# Altium PCB viper_eagle_rep.PcbDoc (part 1 of 4)
Units mm, origin at the board's own origin, x right, y up, seen from the top; angles counter-clockwise.
Board outline 285.4 x 100.18 mm, 2 copper layers (Component Side, Bottom Layer), stack 1.571 mm thick; 351 components, 206 nets, 1213 pads, 248 vias.
Unrouted connection lines stored in the file: 357.
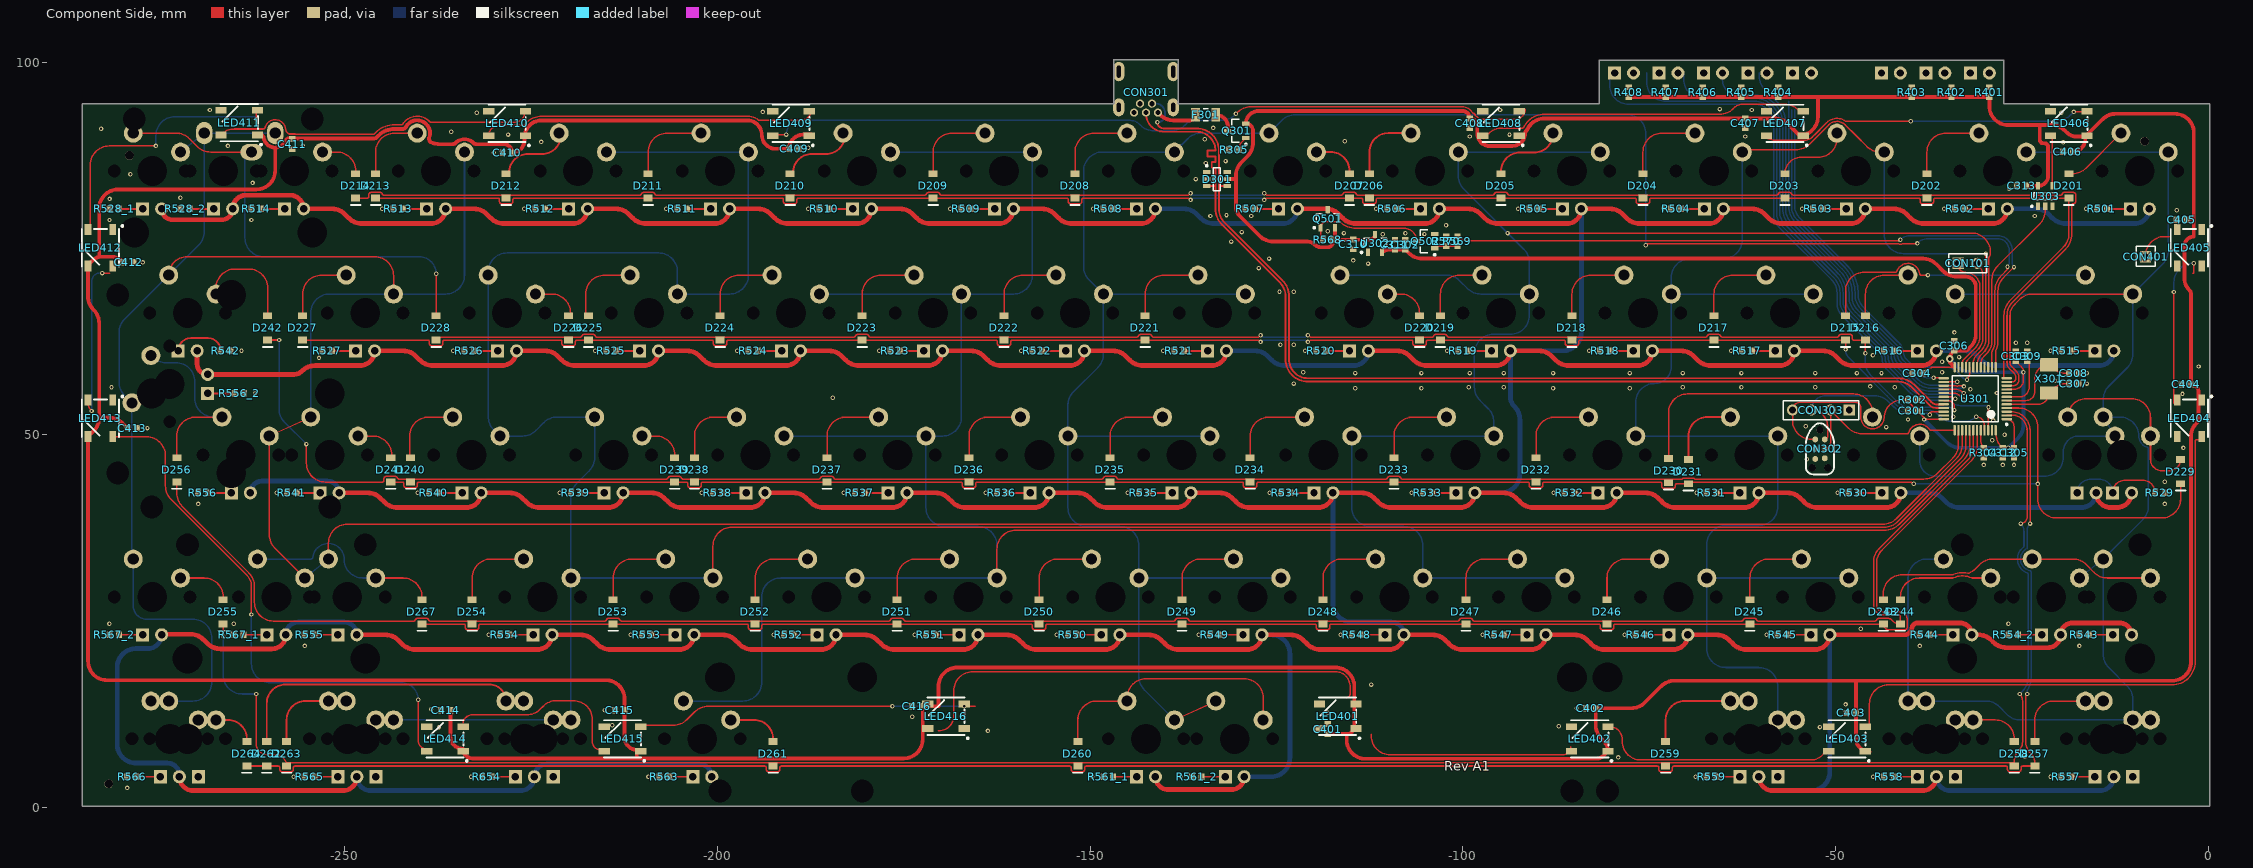
[diagram p0: Component Side view]
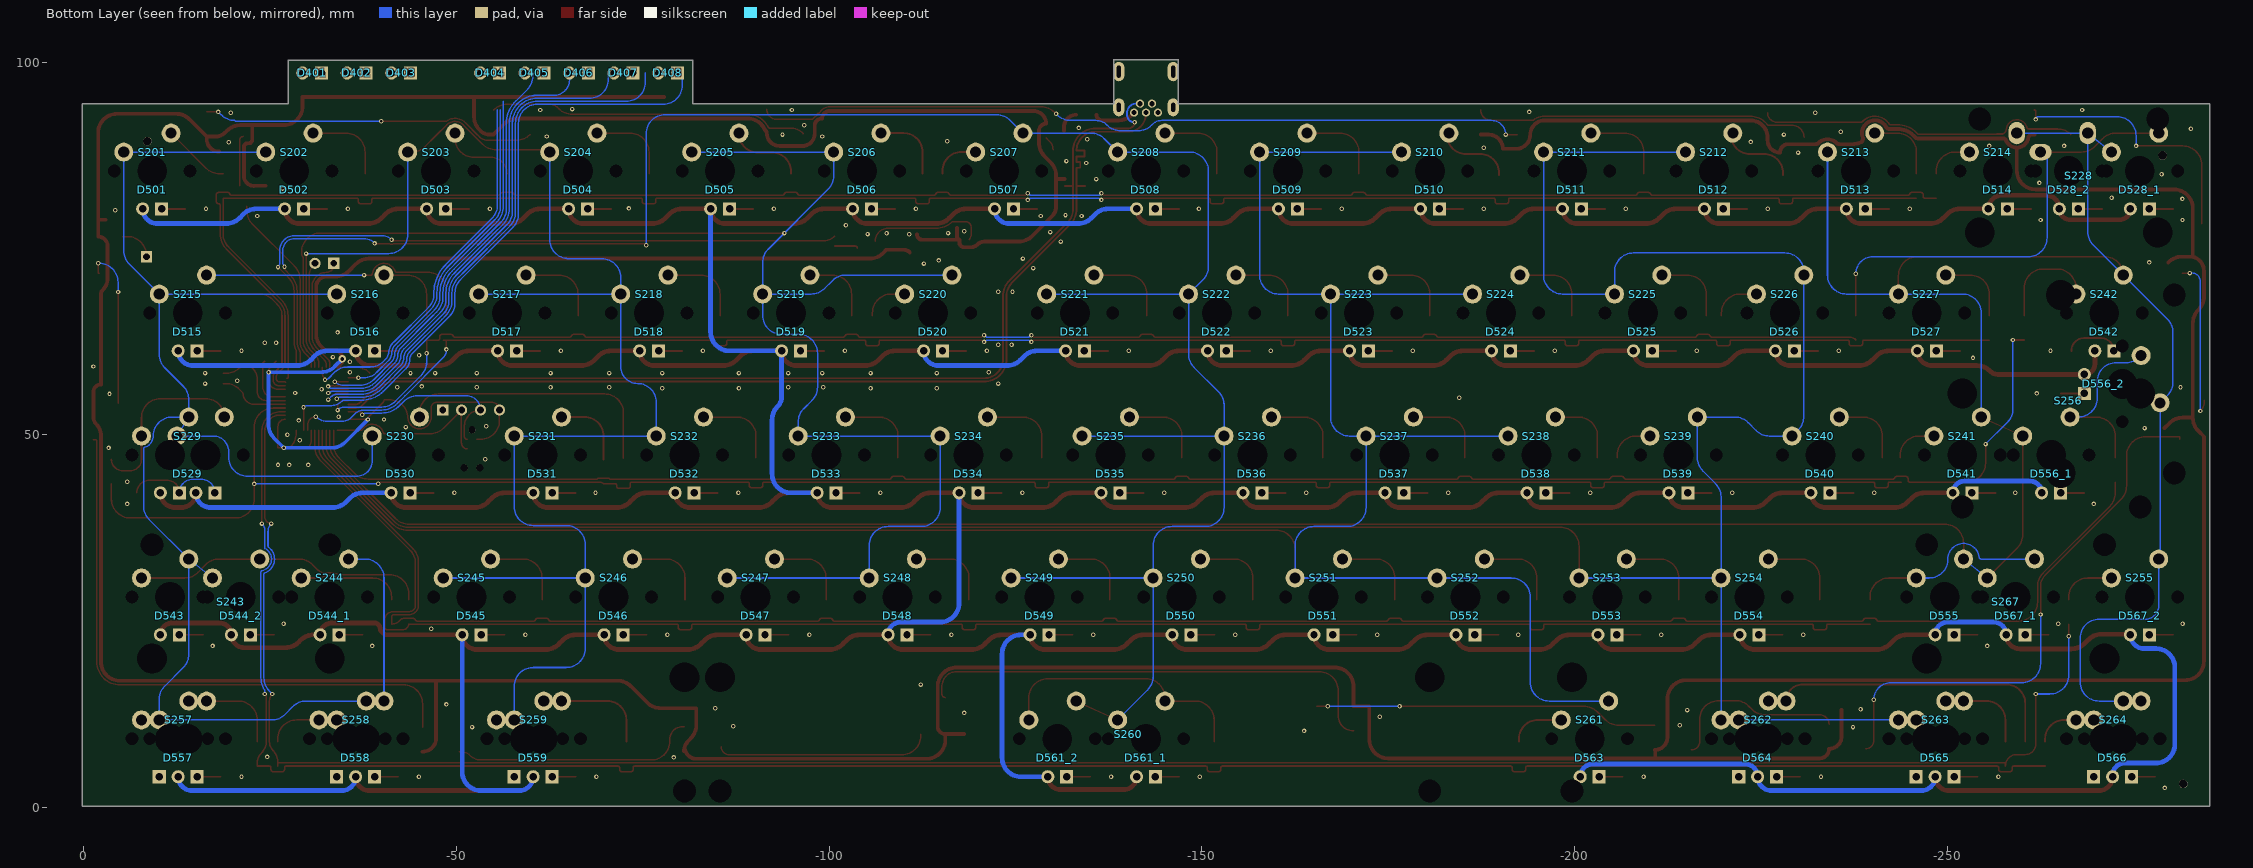
[diagram p1: Bottom Layer view, seen from below]

## Layer stack, top to bottom
Top Solder: solder mask 0.0102, Solder Resist, Dk 3.5
Component Side: signal copper 0.0356
Dielectric 1: core 1.5, FR-4, Dk 4.2
Bottom Layer: signal copper 0.0356
Solder Side: solder mask 0.0102, Solder Resist, Dk 3.5

## Board outline
-285.2,0.215 ccw(c-285.15,0.215) -285.15,0.165 0.15,0.165 ccw(c0.15,0.215) 0.2,0.215 ccw(c0.15,0.215) 0.2,0.215 0.2,94.415 ccw(c0.15,94.415) 0.149,94.465 -27.41,94.465 -27.41,98.044 -27.41,100.245 ccw(c-27.46,100.245) -27.46,100.295 -81.66,100.295 ccw(c-81.66,100.245) -81.71,100.245 -81.71,94.465 -138.15,94.465 -138.15,100.295 ccw(c-138.2,100.295) -138.2,100.345 -146.8,100.345 ccw(c-146.8,100.295) -146.85,100.295 -146.85,94.465 -285.15,94.465 ccw(c-285.15,94.415) -285.2,94.415

## Design rules (kind name [scope] priority, off if disabled: settings)
Clearance [All] p1: gap=0.2 ignorepadtopadclearanceinfootprint=FALSE except(0: Arc-Hole Track-Hole SMDPad-Hole THPad-Hole Via-Hole Fill-Hole Poly-Hole Region-Hole Text-Hole; 0.254: THPad-THPad THPad-Via THPad-Fill THPad-Poly THPad-Region THPad-Text Via-Via Via-Fill Via-Poly Via-Region Via-Text Fill-Fill Fill-Poly Fill-Region Fill-Text Poly-Poly Poly-Region Poly-Text Region-Region Region-Text Text-Text)
ComponentClearance [InComponent('No Component') And OnLayer('Component Side')] p1: gap=0.254 collisioncheckmode=3 verticalgap=0.254 showdistances=FALSE
DiffPairsRouting DiffPairsRouting_USB [InDifferentialPairClass('All Differential Pairs')] p1: maxlimit=0.254 minlimit=0.203 mostfreqgap=0.203 toplayer_minwidth=0.152 toplayer_maxwidth=0.381 toplayer_prefwidth=0.152 bottomlayer_minwidth=0.152 bottomlayer_maxwidth=0.381 bottomlayer_prefwidth=0.152 maxuncoupledlength=12.7
DiffPairsRouting [All] p2: maxlimit=0.254 minlimit=0.254 mostfreqgap=0.254 toplayer_minwidth=0.381 toplayer_maxwidth=0.381 toplayer_prefwidth=0.381 bottomlayer_minwidth=0.381 bottomlayer_maxwidth=0.381 bottomlayer_prefwidth=0.381 maxuncoupledlength=12.7
HoleSize [All] p1: absolutevalues=TRUE maxlimit=20 minlimit=0.025 maxpercent=80.000 minpercent=20.000
MatchedLengths MatchedLengths_USB_DiffPairs_1 [All] p1: tolerance=0.127 checknetsindiffpair=TRUE checkdiffpairvsdiffpair=FALSE checkxsignals=FALSE checkothers=FALSE
MatchedLengths MatchedLengths_USB_DiffPairs [All] p2: tolerance=0.127 checknetsindiffpair=TRUE checkdiffpairvsdiffpair=FALSE checkxsignals=FALSE checkothers=FALSE
PolygonConnect PolygonConnect_1 [All vs IsVia] p1: connectstyle=Direct reliefconductorwidth=0.254 reliefentries=4 polygonreliefangle="90 Angle" airgapwidth=0.254
PolygonConnect [All] p2: connectstyle=Relief reliefconductorwidth=0.254 reliefentries=4 polygonreliefangle="90 Angle" airgapwidth=0.254
RoutingVias [All] p1: holewidth=0.711 width=1.27 viastyle="Through Hole" minholewidth=0.3 minwidth=0.6 maxholewidth=0.711 maxwidth=1.27
SolderMaskExpansion [All] p1: expansion=0.102 istentingtop=FALSE
Width [All] p1: maxlimit=5 minlimit=0.203 preferedwidth=0.203 minimp=50.000000 maximp=50.000000 favimp=50.000000
27 further rules are at their usual default settings.

## Classes and differential pairs
component class 1_viper_eagle_rep_top: CON101
component class Designator: C201 C202 C203 C204 C205 C206 D201 D202 D203 D204 D205 D206 D207 D208 D209 D210 D211 D212 D213 D214 D215 D216 D217 D218 D219 D220 D221 D222 D223 D224 D225 D226 D227 D228 D229 D230 D231 D232 D233 D234 D235 D236 D237 D238 D239 D240 D241 D242 D243 D244 D245 D246 D247 D248 D249 D250 D251 D252 D253 D254 D255 D256 D257 D258 D259 D260 D261 D262 D263 D264 D267 S201 S202 S203 S204 S205 S206 S207 S208 S209 S210 S211 S212 S213 S214 S215 S216 S217 S218 S219 S220 S221 S222 S223 S224 S225 S226 S227 S228 S229 S230 S231 S232 S233 S234 S235 S236 S237 S238 S239 S240 S241 S242 S243 S244 S245 S246 S247 S248 S249 S250 S251 S252 S253 S254 S255 S256 S257 S258 S259 S260 S261 S262 S263 S264 S267
differential pair D: +D_P -D_N

## Components (designator, comment, footprint, x,y, rotation, side; value= is the part's Value field where it differs from the comment)
C301 "" C0603[1608] -39.624,53.213 r0 top value=0.1uF
C302 "" C0603[1608] -107.696,75.511 r270 top value=0.1uF
C303 "" C0603[1608] -25.781,60.54 r270 top value=0.1uF
C304 "" C0603[1608] -38.989,58.293 r0 top value=0.1uF
C305 "" C0603[1608] -26.035,47.625 r90 top value=0.1uF
C306 "" C0603[1608] -34.036,61.976 r270 top value=0.1uF
C307 "" C0603[1608] -18.034,56.896 r180 top value=30pF
C308 "" C0603[1608] -18.034,58.293 r180 top value=30pF
C309 "" C0603[1608] -24.257,60.54 r90 top value=0.1uF
C310 "" C0603[1608] -114.681,75.565 r90 top value=4,7uF
C311 "" C0603[1608] -109.093,75.511 r270 top value=1uF
C312 "" C0603[1608] -27.559,47.625 r90 top value=4,7uF
C313 "" C0603[1608] -25.019,83.439 r0 top value=0.1uF
C401 "" C0603[1608] -118.11,10.541 r270 top value=0.1uF
C402 "" C0603[1608] -82.804,13.335 r0 top value=0.1uF
C403 "" C0603[1608] -47.879,12.7 r0 top value=0.1uF
C404 "" C0603[1608] -2.921,56.769 r0 top value=0.1uF
C405 "" C0603[1608] -3.556,78.867 r0 top value=0.1uF
C406 "" C0603[1608] -18.796,88.011 r0 top value=0.1uF
C407 "" C0603[1608] -62.103,91.821 r90 top value=0.1uF
C408 "" C0603[1608] -99.06,91.821 r90 top value=0.1uF
C409 "" C0603[1608] -189.723,88.392 r180 top value=0.1uF
C410 "" C0603[1608] -228.219,87.884 r0 top value=0.1uF
C411 "" C0603[1608] -257.048,89.027 r90 top value=0.1uF
C412 "" C0603[1608] -279.019,73.152 r180 top value=0.1uF
C413 "" C0603[1608] -278.511,50.927 r180 top value=0.1uF
C414 "" C0603[1608] -236.474,13.081 r0 top value=0.1uF
C415 "" C0603[1608] -213.106,13.081 r0 top value=0.1uF
C416 "" C0603[1608] -173.228,13.589 r0 top value=0.1uF
CON101 "Header 2" HDR1X2#1 -33.528,73.025 r0 top
CON301 "HRO U-M-M5DD-W-2" "HRO U-M-M5DD-W-2" -142.5,93.95 r270 top locked
CON302 "TC2030-IDC" TC2030-IDC-NL -52.07,48.133 r270 top locked
CON303 "Header 4" HDR1X4 -55.753,53.34 r0 top locked
CON401 "Header 1" HDR1X2#2 -8.382,73.914 r90 top
D201 "Diode" SOD-123 -18.669,83.415 r90 top
D202 "Diode" SOD-123 -37.719,83.415 r90 top
D203 "Diode" SOD-123 -56.769,83.415 r90 top
D204 "Diode" SOD-123 -75.819,83.415 r90 top
D205 "Diode" SOD-123 -94.869,83.415 r90 top
D206 "Diode" SOD-123 -112.522,83.415 r90 top
D207 "Diode" SOD-123 -115.189,83.415 r90 top
D208 "Diode" SOD-123 -152.019,83.415 r90 top
D209 "Diode" SOD-123 -171.069,83.415 r90 top
D210 "Diode" SOD-123 -190.246,83.415 r90 top
D211 "Diode" SOD-123 -209.296,83.415 r90 top
D212 "Diode" SOD-123 -228.346,83.415 r90 top
D213 "Diode" SOD-123 -245.872,83.415 r90 top
D214 "Diode" SOD-123 -248.539,83.415 r90 top
D215 "Diode" SOD-123 -48.641,64.365 r90 top
D216 "Diode" SOD-123 -45.974,64.365 r90 top
D217 "Diode" SOD-123 -66.294,64.365 r90 top
D218 "Diode" SOD-123 -85.344,64.365 r90 top
D219 "Diode" SOD-123 -102.997,64.365 r90 top
D220 "Diode" SOD-123 -105.791,64.365 r90 top
D221 "Diode" SOD-123 -142.621,64.365 r90 top
D222 "Diode" SOD-123 -161.544,64.365 r90 top
D223 "Diode" SOD-123 -180.594,64.365 r90 top
D224 "Diode" SOD-123 -199.644,64.365 r90 top
D225 "Diode" SOD-123 -217.297,64.365 r90 top
D226 "Diode" SOD-123 -219.964,64.365 r90 top
D227 "Diode" SOD-123 -255.651,64.365 r90 top
D228 "Diode" SOD-123 -237.744,64.365 r90 top
D229 "Diode" SOD-123 -3.683,45.085 r90 top
D230 "Diode" SOD-123 -72.39,45.212 r90 top
D231 "Diode" SOD-123 -69.723,45.085 r90 top
D232 "Diode" SOD-123 -90.17,45.315 r90 top
D233 "Diode" SOD-123 -109.22,45.315 r90 top
D234 "Diode" SOD-123 -128.524,45.315 r90 top
D235 "Diode" SOD-123 -147.32,45.315 r90 top
D236 "Diode" SOD-123 -166.243,45.315 r90 top
D237 "Diode" SOD-123 -185.293,45.315 r90 top
D238 "Diode" SOD-123 -203.073,45.315 r90 top
D239 "Diode" SOD-123 -205.74,45.315 r90 top
D240 "Diode" SOD-123 -241.173,45.315 r90 top
D241 "Diode" SOD-123 -243.84,45.315 r90 top
D242 "Diode" SOD-123 -260.35,64.365 r90 top
D243 "Diode" SOD-123 -43.561,26.265 r90 top
D244 "Diode" SOD-123 -41.275,26.265 r90 top
D245 "Diode" SOD-123 -61.468,26.265 r90 top
D246 "Diode" SOD-123 -80.645,26.265 r90 top
D247 "Diode" SOD-123 -99.568,26.265 r90 top
D248 "Diode" SOD-123 -118.745,26.265 r90 top
D249 "Diode" SOD-123 -137.668,26.265 r90 top
D250 "Diode" SOD-123 -156.845,26.265 r90 top
D251 "Diode" SOD-123 -175.895,26.265 r90 top
D252 "Diode" SOD-123 -194.945,26.265 r90 top
D253 "Diode" SOD-123 -213.995,26.265 r90 top
D254 "Diode" SOD-123 -232.918,26.265 r90 top
D255 "Diode" SOD-123 -266.319,26.265 r90 top
D256 "Diode" SOD-123 -272.542,45.315 r90 top
D257 "Diode" SOD-123 -23.241,7.215 r90 top
D258 "Diode" SOD-123 -26,7.215 r90 top
D259 "Diode" SOD-123 -72.771,7.215 r90 top
D260 "Diode" SOD-123 -151.638,7.215 r90 top
D261 "Diode" SOD-123 -192.532,7.215 r90 top
D262 "Diode" SOD-123 -260.477,7.215 r90 top
D263 "Diode" SOD-123 -257.81,7.215 r90 top
D264 "Diode" SOD-123 -263.144,7.215 r90 top
D267 "Diode" SOD-123 -239.649,26.265 r90 top
D301 "SRV05" SOT-23-6 -132.969,84.328 r0 top
D401 "LED2" "LED - THT" -30.607,98.565 r180 bottom
D402 "LED2" "LED - THT" -36.576,98.565 r180 bottom
D403 "LED2" "LED - THT" -42.545,98.565 r180 bottom
D404 "LED2" "LED - THT" -54.483,98.565 r180 bottom
D405 "LED2" "LED - THT" -60.452,98.565 r180 bottom
D406 "LED2" "LED - THT" -66.421,98.565 r180 bottom
D407 "LED2" "LED - THT" -72.39,98.565 r180 bottom
D408 "LED2" "LED - THT" -78.359,98.565 r180 bottom
D501 "LED0" "MX-switch - LED" -9.15,85.415 r180 bottom
D502 "LED0" "MX-switch - LED" -28.2,85.415 r180 bottom
D503 "LED0" "MX-switch - LED" -47.25,85.415 r180 bottom
D504 "LED0" "MX-switch - LED" -66.3,85.415 r180 bottom
D505 "LED0" "MX-switch - LED" -85.35,85.415 r180 bottom
D506 "LED0" "MX-switch - LED" -104.4,85.415 r180 bottom
D507 "LED0" "MX-switch - LED" -123.45,85.415 r180 bottom
D508 "LED0" "MX-switch - LED" -142.5,85.415 r180 bottom
D509 "LED0" "MX-switch - LED" -161.55,85.415 r180 bottom
D510 "LED0" "MX-switch - LED" -180.6,85.415 r180 bottom
D511 "LED0" "MX-switch - LED" -199.65,85.415 r180 bottom
D512 "LED0" "MX-switch - LED" -218.7,85.415 r180 bottom
D513 "LED0" "MX-switch - LED" -237.75,85.415 r180 bottom
D514 "LED0" "MX-switch - LED" -256.8,85.415 r180 bottom
D515 "LED0" "MX-switch - LED" -13.912,66.365 r180 bottom
D516 "LED0" "MX-switch - LED" -37.725,66.365 r180 bottom
D517 "LED0" "MX-switch - LED" -56.775,66.365 r180 bottom
D518 "LED0" "MX-switch - LED" -75.825,66.365 r180 bottom
D519 "LED0" "MX-switch - LED" -94.875,66.365 r180 bottom
D520 "LED0" "MX-switch - LED" -113.925,66.365 r180 bottom
D521 "LED0" "MX-switch - LED" -132.975,66.365 r180 bottom
D522 "LED0" "MX-switch - LED" -152.025,66.365 r180 bottom
D523 "LED0" "MX-switch - LED" -171.075,66.365 r180 bottom
D524 "LED0" "MX-switch - LED" -190.125,66.365 r180 bottom
D525 "LED0" "MX-switch - LED" -209.175,66.365 r180 bottom
D526 "LED0" "MX-switch - LED" -228.225,66.365 r180 bottom
D527 "LED0" "MX-switch - LED" -247.275,66.365 r180 bottom
D528_1 "LED0" "MX-switch - LED" -275.844,85.415 r180 bottom
D528_2 "LED0" "MX-switch - LED" -266.319,85.415 r180 bottom
D529 "LED0" "MX-switch - CAPS - LED NO SWITCH" -16.294,47.315 r180 bottom
D530 "LED0" "MX-switch - LED" -42.487,47.315 r180 bottom
D531 "LED0" "MX-switch - LED" -61.537,47.315 r180 bottom
D532 "LED0" "MX-switch - LED" -80.587,47.315 r180 bottom
D533 "LED0" "MX-switch - LED" -99.637,47.315 r180 bottom
D534 "LED0" "MX-switch - LED" -118.687,47.315 r180 bottom
D535 "LED0" "MX-switch - LED" -137.737,47.315 r180 bottom
D536 "LED0" "MX-switch - LED" -156.787,47.315 r180 bottom
D537 "LED0" "MX-switch - LED" -175.837,47.315 r180 bottom
D538 "LED0" "MX-switch - LED" -194.887,47.315 r180 bottom
D539 "LED0" "MX-switch - LED" -213.937,47.315 r180 bottom
D540 "LED0" "MX-switch - LED" -232.987,47.315 r180 bottom
D541 "LED0" "MX-switch - LED" -252.031,47.315 r180 bottom
D542 "LED0" "MX-switch - LED" -271.087,66.365 r180 bottom
D543 "LED0" "MX-switch - LED" -11.531,28.265 r180 bottom
D544_1 "LED0" "MX-switch - LED" -32.96,28.265 r180 bottom
D544_2 "LED0" "MX-switch - LED" -21.056,28.265 r180 bottom
D545 "LED0" "MX-switch - LED" -52.012,28.265 r180 bottom
D546 "LED0" "MX-switch - LED" -71.062,28.265 r180 bottom
D547 "LED0" "MX-switch - LED" -90.112,28.265 r180 bottom
D548 "LED0" "MX-switch - LED" -109.162,28.265 r180 bottom
D549 "LED0" "MX-switch - LED" -128.212,28.265 r180 bottom
D550 "LED0" "MX-switch - LED" -147.262,28.265 r180 bottom
D551 "LED0" "MX-switch - LED" -166.312,28.265 r180 bottom
D552 "LED0" "MX-switch - LED" -185.362,28.265 r180 bottom
D553 "LED0" "MX-switch - LED" -204.412,28.265 r180 bottom
D554 "LED0" "MX-switch - LED" -223.462,28.265 r180 bottom
D555 "LED0" "MX-switch - LED" -249.655,28.265 r180 bottom
D556_1 "LED0" "MX-switch - LED" -263.95,47.315 r180 bottom
D556_2 "LED0" "MX-switch - LED" -273.48,56.845 r270 bottom
D557 "LED0" "MX-switch - LED - MODS" -13.912,9.215 r180 bottom
D558 "LED0" "MX-switch - LED - MODS" -37.719,9.215 r180 bottom
D559 "LED0" "MX-switch - LED - MODS" -61.537,9.215 r180 bottom
D561_1 "LED0" "MX-switch - LED" -142.499,9.215 r180 bottom
D561_2 "LED0" "MX-switch - LED" -130.593,9.215 r180 bottom
D563 "LED0" "MX-switch - LED" -202.031,9.215 r180 bottom
D564 "LED0" "MX-switch - LED - MODS" -225.843,9.215 r180 bottom
D565 "LED0" "MX-switch - LED - MODS" -249.65,9.215 r180 bottom
D566 "LED0" "MX-switch - LED - MODS" -273.468,9.215 r180 bottom
D567_1 "LED0" "MX-switch - LED" -259.18,28.265 r180 bottom
D567_2 "LED0" "MX-switch - LED" -275.85,28.265 r180 bottom
F301 "Fuse Thermal" C1206[3216] -134.493,92.964 r180 top
LED401 "WS2812B" WS2812B -116.783,12.25 r180 top
LED402 "WS2812B" WS2812B -82.969,9.215 r180 top
LED403 "WS2812B" WS2812B -48.438,9.215 r180 top
LED404 "WS2812B" WS2812B -2.5,52.235 r270 top
LED405 "WS2812B" WS2812B -2.5,75.115 r270 top
LED406 "WS2812B" WS2812B -18.675,91.8 r180 top
LED407 "WS2812B" WS2812B -56.775,91.8 r180 top
LED408 "WS2812B" WS2812B -94.875,91.8 r180 top
LED409 "WS2812B" WS2812B -190.125,91.8 r180 top
LED410 "WS2812B" WS2812B -228.225,91.8 r180 top
LED411 "WS2812B" WS2812B -264.16,91.9 r180 top
LED412 "WS2812B" WS2812B -282.8,75.115 r270 top
LED413 "WS2812B" WS2812B -282.8,52.235 r270 top
LED414 "WS2812B" WS2812B -236.556,9.215 r180 top
LED415 "WS2812B" WS2812B -212.747,9.215 r180 top
LED416 "WS2812B" WS2812B -169.339,12.25 r180 top
Q301 "PMOS-2" SOT-23-3 -130.302,90.805 r180 top
Q501 "SI2301CDS PMOS" SOT-23-3 -118.11,78.994 r90 top
Q502 "2N7002 NMOS" SOT-23-3 -104.976,76 r180 top
R302 "Res1" R0603[1608] -39.624,54.737 r0 top value=1.5K
R304 "Res1" R0603[1608] -30.099,47.625 r90 top value=10K
R305 "Res1" R0603[1608] -130.683,88.265 r180 top value=10K
R401 "Res1" R0603[1608] -29.337,96 r90 top value=680R
R402 "Res1" R0603[1608] -34.417,96 r90 top value=680R
R403 "Res1" R0603[1608] -39.751,96 r90 top value=680R
R404 "Res1" R0603[1608] -57.658,96 r90 top value=680R
R405 "Res1" R0603[1608] -62.611,96 r90 top value=680R
R406 "Res1" R0603[1608] -67.818,96 r90 top value=680R
R407 "Res1" R0603[1608] -72.771,96 r90 top value=680R
R408 "Res1" R0603[1608] -77.724,96 r90 top value=680R
R501 "Res1" R0603[1608] -14.23,80.335 r0 top value=680R
R502 "Res1" R0603[1608] -33.28,80.335 r0 top value=680R
R503 "Res1" R0603[1608] -52.33,80.335 r0 top value=680R
R504 "Res1" R0603[1608] -71.38,80.335 r0 top value=680R
R505 "Res1" R0603[1608] -90.43,80.335 r0 top value=680R
R506 "Res1" R0603[1608] -109.48,80.335 r0 top value=680R
R507 "Res1" R0603[1608] -128.53,80.335 r0 top value=680R
R508 "Res1" R0603[1608] -147.58,80.335 r0 top value=680R
R509 "Res1" R0603[1608] -166.63,80.335 r0 top value=680R
R510 "Res1" R0603[1608] -185.68,80.335 r0 top value=680R
R511 "Res1" R0603[1608] -204.73,80.335 r0 top value=680R
R512 "Res1" R0603[1608] -223.78,80.335 r0 top value=680R
R513 "Res1" R0603[1608] -242.83,80.335 r0 top value=680R
R514 "Res1" R0603[1608] -261.88,80.335 r0 top value=680R
R515 "Res1" R0603[1608] -18.992,61.285 r0 top value=680R
R516 "Res1" R0603[1608] -42.805,61.285 r0 top value=680R
R517 "Res1" R0603[1608] -61.855,61.285 r0 top value=680R
R518 "Res1" R0603[1608] -80.905,61.285 r0 top value=680R
R519 "Res1" R0603[1608] -99.955,61.285 r0 top value=680R
R520 "Res1" R0603[1608] -119.005,61.285 r0 top value=680R
R521 "Res1" R0603[1608] -138.055,61.285 r0 top value=680R
R522 "Res1" R0603[1608] -157.105,61.285 r0 top value=680R
R523 "Res1" R0603[1608] -176.155,61.285 r0 top value=680R
R524 "Res1" R0603[1608] -195.205,61.285 r0 top value=680R
R525 "Res1" R0603[1608] -214.255,61.285 r0 top value=680R
R526 "Res1" R0603[1608] -233.305,61.285 r0 top value=680R
R527 "Res1" R0603[1608] -252.355,61.285 r0 top value=680R
R528_1 "Res1" R0603[1608] -280.924,80.335 r0 top value=680R
R528_2 "Res1" R0603[1608] -271.399,80.335 r0 top value=680R
R529 "Res1" R0603[1608] -6.451,42.235 r180 top value=680R
R530 "Res1" R0603[1608] -47.567,42.235 r0 top value=680R
R531 "Res1" R0603[1608] -66.617,42.235 r0 top value=680R
R532 "Res1" R0603[1608] -85.667,42.235 r0 top value=680R
R533 "Res1" R0603[1608] -104.717,42.235 r0 top value=680R
R534 "Res1" R0603[1608] -123.767,42.235 r0 top value=680R
R535 "Res1" R0603[1608] -142.817,42.235 r0 top value=680R
R536 "Res1" R0603[1608] -161.867,42.235 r0 top value=680R
R537 "Res1" R0603[1608] -180.917,42.235 r0 top value=680R
R538 "Res1" R0603[1608] -199.967,42.235 r0 top value=680R
R539 "Res1" R0603[1608] -219.017,42.235 r0 top value=680R
R540 "Res1" R0603[1608] -238.067,42.235 r0 top value=680R
R541 "Res1" R0603[1608] -257.112,42.235 r0 top value=680R
R542 "Res1" R0603[1608] -266.007,61.285 r180 top value=680R
R543 "Res1" R0603[1608] -16.611,23.185 r0 top value=680R
R544 "Res1" R0603[1608] -38.04,23.185 r0 top value=680R
R545 "Res1" R0603[1608] -57.092,23.185 r0 top value=680R
R546 "Res1" R0603[1608] -76.142,23.185 r0 top value=680R
R547 "Res1" R0603[1608] -95.192,23.185 r0 top value=680R
R548 "Res1" R0603[1608] -114.242,23.185 r0 top value=680R
R549 "Res1" R0603[1608] -133.292,23.185 r0 top value=680R
R550 "Res1" R0603[1608] -152.342,23.185 r0 top value=680R
R551 "Res1" R0603[1608] -171.392,23.185 r0 top value=680R
R552 "Res1" R0603[1608] -190.442,23.185 r0 top value=680R
R553 "Res1" R0603[1608] -209.492,23.185 r0 top value=680R
R554 "Res1" R0603[1608] -228.542,23.185 r0 top value=680R
R554_2 "Res1" R0603[1608] -26.136,23.185 r0 top value=680R
R555 "Res1" R0603[1608] -254.735,23.185 r0 top value=680R
R556 "Res1" R0603[1608] -269.03,42.235 r0 top value=680R
R556_2 "Res1" R0603[1608] -264.16,55.575 r180 top value=680R
R557 "Res1" R0603[1608] -18.992,4.135 r0 top value=680R
R558 "Res1" R0603[1608] -42.799,4.135 r0 top value=680R
R559 "Res1" R0603[1608] -66.617,4.135 r0 top value=680R
R561_1 "Res1" R0603[1608] -147.579,4.135 r0 top value=680R
R561_2 "Res1" R0603[1608] -135.673,4.135 r0 top value=680R
R563 "Res1" R0603[1608] -207.111,4.135 r0 top value=680R
R565 "Res1" R0603[1608] -254.73,4.135 r0 top value=680R
R566 "Res1" R0603[1608] -278.548,4.135 r0 top value=680R
R567_1 "Res1" R0603[1608] -264.26,23.185 r0 top value=680R
R567_2 "Res1" R0603[1608] -280.93,23.185 r0 top value=680R
R568 "Res1" R0603[1608] -118.11,76.2 r0 top value=2M
R569 "Res1" R0603[1608] -100.711,76 r270 top value=330R
R570 "Res1" R0603[1608] -102.235,76 r90 top value=100k
R654 "Res1" R0603[1608] -230.923,4.135 r0 top value=680R
S201 "MX" "MX-SWITCH - SWITCHED POL" -9.15,85.415 r180 bottom locked
S202 "MX" "MX-switch - switched pol - connector" -28.2,85.415 r180 bottom
S203 "MX" "MX-SWITCH - SWITCHED POL" -47.25,85.415 r180 bottom locked
S204 "MX" "MX-switch - switched pol" -66.3,85.415 r180 bottom
S205 "MX" "MX-switch - switched pol" -85.35,85.415 r180 bottom
S206 "MX" "MX-switch - switched pol" -104.4,85.415 r180 bottom locked
S207 "MX" MX-switch#1 -123.45,85.415 r180 bottom locked
S208 "MX" "MX-switch - switched pol" -142.5,85.415 r180 bottom locked
S209 "MX" "MX-switch - switched pol" -161.55,85.415 r180 bottom locked
S210 "MX" "MX-switch - switched pol" -180.6,85.415 r180 bottom locked
S211 "MX" "MX-switch - switched pol" -199.65,85.415 r180 bottom
S212 "MX" "MX-switch - switched pol" -218.7,85.415 r180 bottom locked
S213 "MX" "MX-switch - switched pol" -237.75,85.415 r180 bottom
S214 "MX" MX-switch#2 -256.8,85.415 r180 bottom locked
S215 "MX" "MX-switch - 1.5U" -13.912,66.365 r180 bottom locked
S216 "MX" "MX-SWITCH - SWITCHED POL" -37.725,66.365 r180 bottom locked
S217 "MX" "MX-SWITCH - SWITCHED POL" -56.775,66.365 r180 bottom locked
S218 "MX" "MX-SWITCH - SWITCHED POL" -75.825,66.365 r180 bottom locked
S219 "MX" "MX-SWITCH - SWITCHED POL" -94.875,66.365 r180 bottom locked
S220 "MX" MX-switch#1 -113.925,66.365 r180 bottom locked
S221 "MX" "MX-SWITCH - SWITCHED POL" -132.975,66.365 r180 bottom locked
S222 "MX" "MX-SWITCH - SWITCHED POL" -152.025,66.365 r180 bottom locked
S223 "MX" "MX-SWITCH - SWITCHED POL" -171.075,66.365 r180 bottom locked
S224 "MX" "MX-SWITCH - SWITCHED POL" -190.125,66.365 r180 bottom locked
S225 "MX" "MX-SWITCH - SWITCHED POL" -209.175,66.365 r180 bottom locked
S226 "MX" MX-switch#1 -228.225,66.365 r180 bottom locked
S227 "MX" "MX-SWITCH - SWITCHED POL" -247.275,66.365 r180 bottom locked
S228 "MX" "MX-switch - backspace" -266.319,85.415 r180 bottom locked
S229 "MX" "MX-switch - CAPS" -16.294,47.315 r180 bottom locked
S230 "MX" "MX-SWITCH - SWITCHED POL" -42.487,47.315 r180 bottom locked
S231 "MX" "MX-SWITCH - SWITCHED POL" -61.537,47.315 r180 bottom locked
S232 "MX" "MX-SWITCH - SWITCHED POL" -80.587,47.315 r180 bottom locked
S233 "MX" "MX-SWITCH - SWITCHED POL" -99.637,47.315 r180 bottom locked
S234 "MX" "MX-SWITCH - SWITCHED POL" -118.687,47.315 r180 bottom locked
S235 "MX" "MX-SWITCH - SWITCHED POL" -137.737,47.315 r180 bottom locked
S236 "MX" "MX-SWITCH - SWITCHED POL" -156.787,47.315 r180 bottom locked
S237 "MX" "MX-SWITCH - SWITCHED POL" -175.837,47.315 r180 bottom locked
S238 "MX" "MX-SWITCH - SWITCHED POL" -194.887,47.315 r180 bottom locked
S239 "MX" MX-switch#1 -213.937,47.315 r180 bottom locked
S240 "MX" "MX-SWITCH - SWITCHED POL" -232.987,47.315 r180 bottom locked
S241 "MX" MX-switch#1 -252.031,47.315 r180 bottom locked
S242 "MX" "MX-switch - 1.5U" -271.087,66.365 r180 bottom locked
S243 "MX" "MX-SWITCH - LEFT SHIFT" -21.056,28.265 r180 bottom locked
S244 "MX" MX-switch#1 -32.96,28.265 r180 bottom locked
S245 "MX" "MX-SWITCH - SWITCHED POL" -52.012,28.265 r180 bottom locked
S246 "MX" "MX-SWITCH - SWITCHED POL" -71.062,28.265 r180 bottom locked
S247 "MX" "MX-SWITCH - SWITCHED POL" -90.112,28.265 r180 bottom locked
S248 "MX" "MX-SWITCH - SWITCHED POL" -109.162,28.265 r180 bottom locked
S249 "MX" "MX-SWITCH - SWITCHED POL" -128.212,28.265 r180 bottom locked
S250 "MX" "MX-SWITCH - SWITCHED POL" -147.262,28.265 r180 bottom locked
S251 "MX" "MX-SWITCH - SWITCHED POL" -166.312,28.265 r180 bottom locked
S252 "MX" "MX-SWITCH - SWITCHED POL" -185.362,28.265 r180 bottom locked
S253 "MX" "MX-SWITCH - SWITCHED POL" -204.412,28.265 r180 bottom locked
S254 "MX" "MX-SWITCH - SWITCHED POL" -223.462,28.265 r180 bottom locked
S255 "MX" MX-switch#1 -275.85,28.265 r180 bottom locked
S256 "MX" "MX-switch - Enter - rotated ISO" -263.95,47.315 r180 bottom locked
S257 "MX" "MX-switch - 1.5u MOD-L" -13.912,9.215 r180 bottom locked
S258 "MX" "MX-switch - 1u MOD-L" -37.719,9.215 r180 bottom locked
S259 "MX" "MX-switch - 1.5u MOD-L" -61.537,9.215 r180 bottom locked
S260 "MX" "MX-switch - Space_V2" -142.499,9.215 r180 bottom locked
S261 "MX" MX-switch#1 -202.031,9.215 r180 bottom locked
S262 "MX" "MX-switch - 1.5u MOD-R" -223.462,9.215 r180 bottom locked
S263 "MX" "MX-switch - 1u MOD-R" -247.269,9.215 r180 bottom locked
S264 "MX" "MX-switch - 1.5u MOD-R" -271.087,9.215 r180 bottom locked
S267 "MX" "MX-SWITCH - RIGHT SHIFT" -259.18,28.265 r180 bottom locked
U301 "STM32F072/F303_LQFP48" "STM32 - LQFP48, 7x7mm" -31.242,54.864 r180 top locked
U302 "SOT23 LDO" SOT-23-3 -111.76,75.692 r90 top
U303 "SN74LV1T125" SOT-23-5 -21.844,82.042 r90 top
X301 "XTAL" "CTS 445-series crystal" -21.336,57.531 r90 top value=8MHz

## Footprints (in the part's own frame and the unit in brackets; to place one, negate y for a bottom-side part, rotate by r counter-clockwise, add the part's x,y. Pads: shape width x height; smd on the part's side, far side on the other; paste and mask are expansions set on the pad)
C0603[1608] [mm] "Chip Resistor, 2-Leads, Body 1,57x0,80mm, IPC Medium Density"
  rect 0.8x0.85 smd: 1(-0.65,0) 2(0.65,0)
  body extent -0.83,-0.43 0.82,0.43, height 0.5
C1206[3216] [mm]
  rect 1.2x1.8 smd: 1(-1.35,0) 2(1.35,0)
  silkscreen extent -0.35,-0.8 0.35,0.8, body extent -1.6,-0.9 1.6,0.9, height 1.2
"CTS 445-series crystal" [mm]
  rect 1.8x2.4 smd: 1(-1.9,0) 2(1.9,0)
  body extent -2.5,-1.6 2.5,1.6, height 1.3
HDR1X2#1 [mm] "Connector; Header; 2 Position"
  rect 1.5x1.5 hole 0.9: 1(0,0)
  round 1.5 hole 0.9: 2(2.54,0)
  silkscreen extent -1.27,-1.27 3.81,1.27
HDR1X2#2 [mm] "Connector; Header; 2 Position"
  rect 1.5x1.5 hole 0.9: 1(0,0)
  silkscreen extent -1.27,-1.27 1.38,1.27
HDR1X4 [mm] "Connector; Header; 4 Position"
  round 1.5 hole 0.9 mask+0.102: 1(0,0) 2(2.54,0) 3(5.08,0)
  rect 1.5x1.5 hole 0.9 mask+0.102: 4(7.62,0)
  silkscreen extent -1.27,-1.27 8.89,1.27
"HRO U-M-M5DD-W-2" [mm]
  round 1.1 hole 0.7: 1(0.7,1.6) 2(-0.5,0.8) 3(0.7,0) 4(-0.5,-0.8) 5(0.7,-1.6)
  oval 2.6x1.5 hole 0.5 slot 1.6 at 0 deg: S(-4.8,3.65) S(-4.8,-3.65)
  oval 2.4x1.5 hole 0.5 slot 1.2 at 0 deg: S(0,3.65) S(0,-3.65)
"LED - THT" [mm] "MX Spec"
  round 1.75 hole 1 mask+0.102: 1(-1.27,0)
  rect 1.75x1.75 hole 1 mask+0.102: 2(1.27,0)
  round 1 on Mech14: ""(0,0)
MX-switch#1 [mm]
  round 2.54 hole 1.499 mask+0.102: 1(-3.81,2.54) 2(2.54,5.08)
  round 1 hole 1.702 unplated: ""(-5.08,0) ""(5.08,0)
  round 1 hole 3.988 unplated: ""(0,0)
MX-switch#2 [mm]
  round 2.54 hole 1.499 mask+0.102: 1(-3.81,2.54)
  oval 2.2x3 hole 1.499 mask+0.102: 2(2.54,5.08)
  round 1 hole 1.702 unplated: ""(-5.08,0) ""(5.08,0)
  round 1 hole 3.988 unplated: ""(0,0)
"MX-switch - 1.5U" [mm]
  round 2.54 hole 1.499 mask+0.102: 1(-3.81,2.54) 2(2.54,5.08)
  round 1 hole 1.702 unplated: ""(-5.08,0) ""(5.08,0)
  round 1 hole 3.988 unplated: ""(0,0)
  round 1 on Mech14: ""(0,0)
"MX-switch - 1.5u MOD-L" [mm]
  round 2.54 hole 1.499 mask+0.102: 1(-6.191,2.54) 1(-3.81,2.54) 2(0.159,5.08) 2(2.54,5.08)
  round 1 hole 1.702 unplated: ""(-7.461,0) ""(-5.08,0) ""(2.699,0) ""(5.08,0)
  round 1 on Mech14: ""(-4.763,0) ""(-2.381,0) ""(0,0) ""(4.763,0)
  round 1 hole 3.988 unplated: ""(-2.381,0) ""(0,0)
"MX-switch - 1.5u MOD-R" [mm]
  round 2.54 hole 1.499 mask+0.102: 1(-3.81,2.54) 1(-1.429,2.54) 2(2.54,5.08) 2(4.921,5.08)
  round 1 hole 1.702 unplated: ""(-5.08,0) ""(-2.699,0) ""(5.08,0) ""(7.461,0)
  round 1 on Mech14: ""(-2.381,0) ""(0,0) ""(2.381,0) ""(4.763,0)
  round 1 hole 3.988 unplated: ""(0,0) ""(2.381,0)
"MX-switch - 1u MOD-L" [mm]
  round 2.54 hole 1.499 mask+0.102: 1(-6.191,2.54) 1(-3.81,2.54) 2(0.159,5.08) 2(2.54,5.08)
  round 1 hole 1.702 unplated: ""(-7.461,0) ""(-5.08,0) ""(2.699,0) ""(5.08,0)
  round 1 hole 3.988 unplated: ""(-2.381,0) ""(0,0)
  round 1 on Mech14: ""(-2.381,0) ""(0,0) ""(2.381,0)
"MX-switch - 1u MOD-R" [mm]
  round 2.54 hole 1.499 mask+0.102: 1(-3.81,2.54) 1(-1.429,2.54) 2(2.54,5.08) 2(4.921,5.08)
  round 1 hole 1.702 unplated: ""(-5.08,0) ""(-2.699,0) ""(5.08,0) ""(7.461,0)
  round 1 on Mech14: ""(-4.763,0) ""(-2.381,0) ""(0,0) ""(2.381,0)
  round 1 hole 3.988 unplated: ""(0,0) ""(2.381,0)
"MX-switch - backspace" [mm]
  oval 2.2x3 hole 1.499 mask+0.102: 1(2.54,5.08)
  round 2.54 hole 1.499 mask+0.102: 1(5.715,2.54) 2(12.065,5.08)
  oval 3x2.2 hole 1.499 mask+0.102: 2(-3.81,2.54)
  round 1.524 hole 3.988 unplated: ""(-11.938,-8.255) ""(11.938,-8.255)
  round 1.524 hole 3.048 unplated: ""(-11.938,6.985) ""(11.938,6.985)
  round 1 hole 1.702 unplated: ""(-5.08,0) ""(4.445,0) ""(5.08,0) ""(14.605,0)
  round 1 hole 3.988 unplated: ""(0,0) ""(9.525,0)
  round 1 on Mech14: ""(0,0) ""(9.525,0)
"MX-switch - CAPS" [mm]
  round 2.54 hole 1.499 mask+0.102: 1(-8.572,2.54) 1(2.54,5.08) 2(-3.81,2.54) 2(-2.222,5.08)
  round 1 hole 1.702 unplated: ""(-9.842,0) ""(5.08,0)
  round 1 hole 3.988 unplated: ""(-4.763,0) ""(0,0)
  round 1 on Mech14: ""(-4.763,0) ""(0,0)
"MX-switch - CAPS - LED NO SWITCH" [mm]
  round 1.75 hole 1 mask+0.102: 1(-6.033,-5.08) 1(-1.27,-5.08)
  rect 1.75x1.75 hole 1 mask+0.102: 2(-3.493,-5.08) 2(1.27,-5.08)
  round 1 on Mech14: ""(0,0)
"MX-switch - Enter - rotated ISO" [mm]
  round 2.54 hole 1.499 mask+0.102: 1(2.54,5.08) 1(12.07,13.34) 2(-3.81,2.54) 2(14.61,6.99)
  round 1.524 hole 3.048 unplated: ""(-11.938,-6.985) ""(11.938,-6.985) ""(16.515,-2.408) ""(16.515,21.468)
  round 1.524 hole 3.988 unplated: ""(-11.938,8.255) ""(1.275,-2.408) ""(1.275,21.468) ""(11.938,8.255)
  round 1 hole 1.702 unplated: ""(-5.08,0) ""(5.08,0) ""(9.53,4.45) ""(9.53,14.61)
  round 1 hole 3.988 unplated: ""(0,0) ""(9.53,9.53)
  round 1 on Mech14: ""(0,0) ""(9.53,9.53)
"MX-switch - LED" [mm]
  round 1.75 hole 1 mask+0.102: 1(-1.27,-5.08)
  rect 1.75x1.75 hole 1 mask+0.102: 2(1.27,-5.08)
  round 1 on Mech14: ""(0,0)
"MX-switch - LED - MODS" [mm]
  round 1.75 hole 1 mask+0.102: 1(-1.27,-5.08)
  rect 1.75x1.75 hole 1 mask+0.102: 2(-3.81,-5.08) 2(1.27,-5.08)
  round 1 on Mech14: ""(0,0)
"MX-SWITCH - LEFT SHIFT" [mil]
  round 100 hole 59 mask+4: 1(-525,100) 1(100,200) 2(-275,200) 2(-150,100)
  round 39.37 hole 67.01 unplated: ""(-575,0) ""(-200,0) ""(-175,0) ""(200,0)
  round 60 hole 157.01 unplated: ""(-470,-325) ""(470,-325)
  round 60 hole 120 unplated: ""(-470,275) ""(470,275)
  round 39.37 hole 157.01 unplated: ""(-375,0) ""(0,0)
  round 39.37 on Mech14: ""(-375,0) ""(0,0)
"MX-SWITCH - RIGHT SHIFT" [mil]
  round 100 hole 59 mask+4: 1(-525,100) 1(100,200) 2(-275,200) 2(-150,100)
  round 39.37 hole 67.01 unplated: ""(-575,0) ""(-200,0) ""(-175,0) ""(200,0)
  round 60 hole 157.01 unplated: ""(-470,-325) ""(470,-325)
  round 60 hole 120 unplated: ""(-470,275) ""(470,275)
  round 39.37 hole 157.01 unplated: ""(-375,0) ""(0,0)
  round 39.37 on Mech14: ""(-375,0) ""(0,0)
"MX-switch - Space_V2" [mil]
  round 100 hole 59 mask+4: 1(-368.75,200) 1(-150,100) 2(-618.75,100) 2(100,200)
  round 60 hole 120 unplated: ""(-2437.4,-275) ""(-2250,-275) ""(1499.61,-275) ""(2250,-275)
  round 60 hole 157.01 unplated: ""(-2437.4,325) ""(-2250,325) ""(1499.61,325) ""(2250,325)
  round 39.37 hole 67.01 unplated: ""(-668.75,0) ""(-268.75,0) ""(-200,0) ""(200,0)
  round 39.37 hole 157.01 unplated: ""(-468.75,0) ""(0,0)
  round 39.37 on Mech14: ""(-468.75,0) ""(0,0)
"MX-SWITCH - SWITCHED POL" [mm]
  round 2.54 hole 1.499 mask+0.102: 1(2.54,5.08) 2(-3.81,2.54)
  round 1 hole 1.702 unplated: ""(-5.08,0) ""(5.08,0)
  round 1 hole 3.988 unplated: ""(0,0)
"MX-switch - switched pol" [mm]
  round 2.54 hole 1.499 mask+0.102: 1(2.54,5.08) 2(-3.81,2.54)
  round 1 hole 1.702 unplated: ""(-5.08,0) ""(5.08,0)
  round 1 hole 3.988 unplated: ""(0,0)
"MX-switch - switched pol - connector" [mm]
  round 2.54 hole 1.499 mask+0.102: 1(2.54,5.08) 2(-3.81,2.54)
  round 1 hole 1.702 unplated: ""(-5.08,0) ""(5.08,0)
  round 1 hole 3.988 unplated: ""(0,0)
R0603[1608] [mm] "Chip Resistor, 2-Leads, Body 1,57x0,80mm, IPC Medium Density"
  rect 0.8x0.85 smd: 1(-0.65,0) 2(0.65,0)
  body extent -0.83,-0.43 0.82,0.43, height 0.5
SOD-123 [mm]
  rect 0.91x1.22 smd: 1(1.635,0) 2(-1.635,0)
  silkscreen extent -2.54,-0.64 -2.54,0.63, body extent -1.87,-0.85 1.88,0.85, height 1.2
SOT-23-3 [mm] "3.3v regulator, used in Windsond S2 proto 1"
  rect 1x0.55 smd: 1(-1.2,0.95) 2(-1.2,-0.95) 3(1.2,0)
  silkscreen extent -1.33,-1.55 0.7,1.95, body extent -1.45,-1.5 1.1,1.5, height 1
SOT-23-5 [mm]
  rect 1x0.55 smd: 1(-1.375,0.95) 2(-1.375,0) 3(-1.375,-0.95) 4(1.375,-0.95) 5(1.375,0.95)
  silkscreen extent -1.5,-1.55 0.46,1.92, body extent -1.63,-1.5 1.58,1.5, height 0.92
SOT-23-6 [mm]
  rect 1x0.55 smd: 1(-1.375,0.95) 2(-1.375,0) 3(-1.375,-0.95) 4(1.375,-0.95) 5(1.375,0) 6(1.375,0.95)
  silkscreen extent -1.5,-1.55 0.46,1.92, body extent -1.37,-1.44 1.47,1.49, height 1.05
"STM32 - LQFP48, 7x7mm" [mm] "LQFP48, 7x7mm"
  oval 1.45x0.3 smd: 1(-4.225,2.75) 2(-4.225,2.25) 3(-4.225,1.75) 4(-4.225,1.25) 5(-4.225,0.75) 6(-4.225,0.25) 7(-4.225,-0.25) 8(-4.225,-0.75) 9(-4.225,-1.25) 10(-4.225,-1.75) 11(-4.225,-2.25) 12(-4.225,-2.75) 25(4.225,-2.75) 26(4.225,-2.25) 27(4.225,-1.75) 28(4.225,-1.25) 29(4.225,-0.75) 30(4.225,-0.25) 31(4.225,0.25) 32(4.225,0.75) 33(4.225,1.25) 34(4.225,1.75) 35(4.225,2.25) 36(4.225,2.75)
  oval 0.3x1.45 smd: 13(-2.75,-4.225) 14(-2.25,-4.225) 15(-1.75,-4.225) 16(-1.25,-4.225) 17(-0.75,-4.225) 18(-0.25,-4.225) 19(0.25,-4.225) 20(0.75,-4.225) 21(1.25,-4.225) 22(1.75,-4.225) 23(2.25,-4.225) 24(2.75,-4.225) 37(2.75,4.225) 38(2.25,4.225) 39(1.75,4.225) 40(1.25,4.225) 41(0.75,4.225) 42(0.25,4.225) 43(-0.25,4.225) 44(-0.75,4.225) 45(-1.25,4.225) 46(-1.75,4.225) 47(-2.25,4.225) 48(-2.75,4.225)
  silkscreen extent -4.35,-3.1 3.1,3.57, body extent -4.5,-4.5 4.5,4.5, height 1.6
TC2030-IDC-NL [mm] "Tag-Connect 6-Pin with No Legs (PN# TC2030-IDC-NL)"
  round 0.9 hole 0.995 unplated: 0(-2.54,0) 0(2.54,1.016) 0(2.54,-1.016)
  round 0.79 smd paste-0.39: 1(-1.27,-0.635) 2(-1.27,0.635) 3(0,-0.635) 4(0,0.635) 5(1.35,-0.635) 6(1.27,0.635)
  silkscreen extent -3.43,-1.9 3.43,1.9
WS2812B [mm]
  rect 1.5x0.9 smd: 1(-2.45,1.65) 2(-2.45,-1.65) 3(2.45,-1.65) 4(2.45,1.65)
  silkscreen extent -3.05,-2.5 2.5,3.07, body extent -2.65,-2.45 2.7,2.5, height 1.5

## Part data
C301 C302 C303 C304 C305 C306 C309 C313 C401 C402 C403 C404 C405 C406 C407 C408 C409 C410 C411 C412 C413 C414 C415 C416: library part Cap, "Capacitor", LCSC MFG=YAGEO, LCSC Part #=C14663, MFG=KEMET, MFGPN=C0603C104M5RACTU, MRF.Part=CC0603KRX7R9BB104, Version="0603 imperial"
C307 C308: library part Cap, "Capacitor", LCSC MFG="Samsung Electro-Mechanics", LCSC Part #=C22397, MRF.Part=CL10C300JB8NNNC, Version="0603 imperial"
C310 C312: library part Cap, "Capacitor", LCSC MFG="Samsung Electro-Mechanics", LCSC Part #=C19666
C311: library part Cap, "Capacitor", LCSC MFG="Samsung Electro-Mechanics", LCSC Part #=C15849, MFG=KEMET, MFGPN=C0603C104M5RACTU, MRF.Part=CL10A105KB8NNNC, Version="0603 imperial"
CON101: "Header, 2-Pin", LatestRevisionDate=17-Jul-2002, LatestRevisionNote="Re-released for DXP Platform.", Publisher="Altium Limited"
CON302: library part "Header 3X2", "Header, 3-Pin, Dual row"
CON303: "Header, 4-Pin"
CON401: library part "Header 2", "Header, 2-Pin", LatestRevisionDate=17-Jul-2002, LatestRevisionNote="Re-released for DXP Platform.", Publisher="Altium Limited"
D201 D202 D203 D204 D205 D206 D207 D208 D209 D210 D211 D212 D213 D214 D215 D216 D217 D218 D219 D220 D221 D222 D223 D224 D225 D226 D227 D228 D229 D230 D231 D232 D233 D234 D235 D236 D237 D238 D239 D240 D241 D242 D243 D244 D245 D246 D247 D248 D249 D250 D251 D252 D253 D254 D255 D256 D257 D258 D259 D260 D261 D262 D263 D264 D267: "Default Diode", LCSC MFG=ST(Semtech), LCSC Part #=C81598, MRF.Part=1N4148W, Version=SOD-123
D301: LCSC MFG="ProTek Devices", LCSC Part #=C85364, MRF.Part=SRV05-4-P-T7
D401 D402 D403 D404 D405 D406 D407 D408: "Typical RED, GREEN, YELLOW, AMBER GaAs LED", LatestRevisionDate=17-Jul-2002, LatestRevisionNote="Re-released for DXP Platform.", PackageDescription="SM LED; 2 Flat Leads", PackageReference=3.2X1.6X1.1, PackageVersion=Feb-2002, Published=8-Jun-2000, Publisher="Altium Limited"
D501 D502 D503 D504 D505 D506 D507 D508 D509 D510 D511 D512 D513 D514 D515 D516 D517 D518 D519 D520 D521 D522 D523 D524 D525 D526 D527 D528_1 D528_2 D529 D530 D531 D532 D533 D534 D535 D536 D537 D538 D539 D540 D541 D542 D543 D544_1 D544_2 D545 D546 D547 D548 D549 D550 D551 D552 D553 D554 D555 D556_1 D556_2 D557 D558 D559 D561_1 D561_2 D563 D564 D565 D566 D567_1 D567_2: "Typical INFRARED GaAs LED", LatestRevisionDate=08-Jul-2005, LatestRevisionNote="Mech Layer 1 removed.", PackageDescription="LED; 2 Leads", PackageReference=LED-0, Published=8-Jun-2000, Publisher="Altium Limited"
F301: "Thermal Fuse", LCSC MFG="Shenzhen JDT Fuse", LCSC Part #=C135338, MFG="Bel Fuse Inc.", MFGPN=0ZCJ0050FF2G, MRF.Part=ASMD1206-050
LED401 LED402 LED403 LED404 LED405 LED406 LED407 LED408 LED409 LED410 LED411 LED412 LED413 LED414 LED415 LED416: LCSC MFG=Worldsemi, LCSC Part #=C965555, MRF.Part=WS2812B-2020
Q301: "P-Channel Power MOSFET", LCSC MFG="Vishay Intertech", LCSC Part #=C10487, MRF.Part=SI2301CDS-T1-GE3, Version=SOT23-3
Q501: library part PMOS-2, "P-Channel Power MOSFET", LCSC MFG="Vishay Intertech", LCSC Part #=C10487, MRF.Part=SI2301CDS-T1-GE3, Note="Pin 4 not drawn and electrically connected to Pin 2."
Q502: library part MOSFET-N, "N-Channel MOSFET", LCSC MFG="Changjiang Electronics Tech (CJ)", LCSC Part #=C8545, MRF.Part=2N7002
R302: "Resistor", LCSC MFG="Uniroyal Elec", LCSC Part #=C22843, MRF.Part=0603WAF1501T5E, Version="0603 imperial"
R304 R305: "Resistor", LCSC MFG="Uniroyal Elec", LCSC Part #=C25804, MFG="Panasonic Electronic Components", MFGPN=ERJ-3EKF5101V, MRF.Part=0603WAF1002T5E, Version="0603 imperial"
R401 R402 R403 R404 R405 R406 R407 R408 R501 R502 R503 R504 R505 R506 R507 R508 R509 R510 R511 R512 R513 R514 R515 R516 R517 R518 R519 R520 R521 R522 R523 R524 R525 R526 R527 R528_1 R528_2 R529 R530 R531 R532 R533 R534 R535 R536 R537 R538 R539 R540 R541 R542 R543 R544 R545 R546 R547 R548 R549 R550 R551 R552 R553 R554 R554_2 R555 R556 R556_2 R557 R558 R559 R561_1 R561_2 R563 R565 R566 R567_1 R567_2 R654: "Resistor", LCSC MFG="Uniroyal Elec", LCSC Part #=C23228, MRF.Part=0603WAF6800T5E, Version="0603 imperial"
R568: "Resistor", LCSC MFG="Uniroyal Elec", LCSC Part #=C22976, MRF.Part=0603WAF2004T5E, Version="0603 imperial"
R569: "Resistor", LCSC MFG="Uniroyal Elec", LCSC Part #=C23138, MRF.Part=0603WAF3300T5E, Version="0603 imperial"
R570: "Resistor", LCSC MFG="Uniroyal Elec", LCSC Part #=C25803, MRF.Part=0603WAF1003T5E, Version="0603 imperial"
S201 S202 S203 S204 S205 S206 S207 S208 S209 S210 S211 S212 S213 S214 S216 S217 S218 S219 S220 S221 S222 S223 S224 S225 S226 S227 S228 S229 S230 S231 S232 S233 S234 S235 S236 S237 S238 S239 S240 S241 S242 S243 S244 S245 S246 S247 S248 S249 S250 S251 S252 S253 S254 S255 S256 S257 S258 S259 S260 S261 S262 S263 S264 S267: library part SW-PB, "Switch"
S215: library part SW-PB, "TAB"
U302: LCSC MFG="Torex Semicon", LCSC Part #=C5446, MFG="Texas Instruments", MFGPN=TPS7A0533PDBZ, MRF.Part=XC6206P332MR
U303: "SN74LV1T125 or SN74LV1T34. Connect OE to GND", LCSC MFG="Texas Instruments", LCSC Part #=C473338, MRF.Part=SN74LV1T125DBVR, Version=SOT-23
X301: "Crystal Oscillator", LCSC MFG="Yangxing Tech", LCSC Part #=C115962, MRF.Part=X50328MSB2GI, Version=SMD-5032_2P
U301: MFG=STMicroelectronics, MFGPN=STM32F072CBT6TR

## Free pads (board coordinates)
  round 1.152 hole 1.152 unplated paste+0.148 mask+0.148: ""(-281.686,3.175) ""(-278.892,87.503) ""(-8.509,89.408)

## Via types
v1: diameter 0.6, hole 0.3, Component Side to Bottom Layer, tented both sides, 247 vias
v2: diameter 1, hole 0.5, Component Side to Bottom Layer, tented both sides, 1 vias

## Nets (pads, with @x,y where several pads share a name; then routed paths per layer and width w, separated by ;. In a path a pad name is that pad's centre, name@x,y a point inside that pad or via, vN(x,y) a via of type N, cw(c..) or ccw(c..) an arc to the next point about the centre after c; other vN are vias at no path point)
BOOT0: R304.2 U301.44 | length 2.5
  Component Side w0.203: U301.44@-30.492,50.639 -30.492,49.224 ccw(c-29.15,49.224) R304.2@-30.099,48.275
col1: S201.2 S202.2 S215.1 S216.2 S229.2 S230.2 S243.2 S244.2 S257.1 S258.2 U301.10 | length 252.3
  Component Side w0.203: U301.10@-27.017,56.614 -26.162,56.614 ccw(c-26.162,57.398) -25.378,57.398 -25.378,57.494 ccw(c-27.097,57.494) -25.379,57.554 cw(c-25.176,57.561) -25.379,57.569 ccw(c-26.279,57.612) -25.378,57.612 ccw(c-26.812,57.612) -25.797,58.625 ccw(c-26.812,57.612) -25.798,58.627 ; -25.881,58.71 -25.798,58.627 ; S215.1@-10.102,68.905 -23.515,68.905 ccw(c-23.515,66.365) -25.311,68.161 -25.781,67.691 -25.946,67.526 ccw(c-24.436,66.014) -26.085,67.373 ccw(c-24.436,66.014) -26.573,66.014 -26.573,59.667 ccw(c-25.931,59.667) -26.385,59.213 -25.798,58.627
  Bottom Layer w0.203: S258.2@-40.259,14.295 -40.259,30.805 cw(c-37.719,30.805) -37.719,33.345 S244.2@-35.5,33.345 ; S230.2@-38.677,49.855 -38.677,46.551 ccw(c-36.576,46.551) -36.576,44.45 -21.971,44.45 ccw(c-21.971,46.99) -19.431,46.99 -19.431,47.752 cw(c-17.328,47.752) -17.328,49.855 S229.2@-12.484,49.855 S229.2@-14.071,52.395 ; S258.2@-37.878,14.295 -29.825,14.295 cw(c-29.825,11.755) -28.029,13.551 -26.977,12.499 ccw(c-25.181,14.295) -25.181,11.755 S257.1@-10.102,11.755 -10.102,14.584 ccw(c-12.467,14.584) -10.795,16.256 -13.327,18.788 cw(c-11.531,20.584) -14.071,20.584 S243.2@-14.071,33.345 ; S216.2@-33.915,68.905 S215.1@-10.102,68.905 ; S202.2@-24.39,87.955 S201.2@-5.34,87.955 -5.34,74.72 cw(c-7.88,74.72) -6.084,72.924 S215.1@-10.102,68.905 ; S243.2@-17.246,30.805 S243.2@-14.071,33.345 ; -9.291,49.783 cw(c-7.721,49.855) -9.292,49.912 ; S243.2@-14.071,33.345 -8.745,38.671 ccw(c-10.541,40.467) -8.001,40.467 -8.001,48.146 ccw(c-8.204,48.147) -8.149,48.343 cw(c-7.721,49.855) -9.292,49.912 ; S229.2@-14.071,52.395 -11.831,52.395 cw(c-11.831,49.855) -9.292,49.912 ; S229.2@-14.071,52.395 -14.071,54.727 cw(c-11.531,54.727) -13.327,56.523 -10.846,59.004 ccw(c-12.642,60.8) -10.102,60.8 S215.1@-10.102,68.905
col2: S203.2 S204.2 S217.2 S218.2 S231.2 S232.2 S245.2 S246.2 S259.1 U301.19 | length 222.7
  Component Side w0.203: S204.2@-62.49,87.955 cw(c-61.742,87.207) -62.26,88.13 cw(c-61.742,87.207) -61.742,88.265 -55.281,88.265 ccw(c-55.281,90.805) -53.485,89.009 -51.171,91.323 cw(c-49.375,89.527) -51.06,91.427 ccw(c-51.195,91.579) -51.034,91.455 cw(c-49.79,90.495) -50.902,91.605 cw(c-49.79,90.495) -50.9,91.607 cw(c-49.79,90.495) -49.79,92.067 cw(c-49.79,90.495) -49.626,92.058 cw(c-49.79,90.495) -49.625,92.058 cw(c-49.79,90.495) -48.799,91.715 ccw(c-48.671,91.872) -48.768,91.694 -48.724,91.65 ccw(c-48.58,91.794) -48.719,91.645 cw(c-49.79,90.495) -48.64,91.566 ccw(c-48.491,91.705) -48.635,91.561 -47.205,90.131 -45.773,88.699 ccw(c-43.977,90.495) -43.977,87.955 S203.2@-43.44,87.955 ; U301.19@-31.492,59.089 -31.492,59.678 cw(c-30.07,59.678) -31.076,60.683 ; -31.076,60.683 -30.542,61.216 ccw(c-32.338,63.012) -29.798,63.012 v1(-29.798,74.342)
  Bottom Layer w0.203: S218.2@-71.8,69.424 ccw(c-71.281,68.905) S218.2@-72.015,68.905 ; S204.2@-62.49,87.955 -62.49,76.2 cw(c-65.03,76.2) -65.03,73.66 -69.475,73.66 ccw(c-69.475,71.12) -72.015,71.12 S218.2@-72.015,68.905 ; S259.1@-57.727,11.755 -57.727,16.256 ccw(c-60.267,16.256) -59.92,18.772 ccw(c-60.267,16.256) -60.267,18.796 -64.712,18.796 cw(c-64.712,21.336) -67.252,21.336 S246.2@-67.252,30.805 ; S217.2@-52.965,68.905 S218.2@-72.015,68.905 ; S245.2@-48.202,30.805 S246.2@-67.252,30.805 ; S203.2@-43.44,87.955 -43.44,76.882 ccw(c-40.9,76.882) -40.9,74.342 v1(-29.798,74.342) ; S218.2@-72.015,68.905 -72.015,59.176 cw(c-74.295,59.176) -74.295,56.896 ccw(c-74.295,54.414) -76.777,54.414 S232.2@-76.777,49.855 S231.2@-57.727,49.855 -57.727,40.386 cw(c-60.267,40.386) -60.267,37.846 -64.712,37.846 ccw(c-64.712,35.306) -67.252,35.306 S246.2@-67.252,30.805
col3: S205.2 S206.2 S219.2 S220.2 S233.2 S234.2 S247.2 S248.2 U301.18 | length 239.9
  Component Side w0.203: v1(-93.98,77.089) -31.739,77.089 cw(c-31.739,74.549) -29.199,74.549 -29.199,74.397 ccw(c-28.995,74.397) -29.198,74.384 ; U301.18@-30.992,59.089 -30.992,59.474 cw(c-29.248,59.474) -30.481,60.707 -30.139,61.049 ccw(c-31.935,62.845) -29.395,62.845 -29.395,72.078 -29.395,73.279 -29.395,73.812 cw(c-29.192,73.812) -29.345,73.946 ccw(c-29.798,74.342) -29.199,74.294 ; -29.199,74.295 ccw(c-29.798,74.342) -29.198,74.383
  Bottom Layer w0.203: S220.2@-116.465,71.445 -102.215,71.445 cw(c-102.215,68.905) -100.419,70.701 -99.367,69.649 ccw(c-97.571,71.445) -97.571,68.905 S219.2@-91.065,68.905 ; S247.2@-86.302,30.805 S248.2@-105.352,30.805 -105.352,35.179 ccw(c-107.892,35.179) -107.892,37.719 -112.337,37.719 cw(c-112.337,40.259) -114.877,40.259 S234.2@-114.877,49.855 S233.2@-95.827,49.855 -95.827,51.722 ccw(c-98.367,51.722) -96.571,53.518 -97.681,54.628 cw(c-95.885,56.424) -98.425,56.424 -98.425,60.96 cw(c-95.885,60.96) -95.885,63.5 -93.605,63.5 ccw(c-93.605,66.04) -91.065,66.04 S219.2@-91.065,68.905 ; S205.2@-81.54,87.955 S206.2@-100.59,87.955 -100.59,84.751 ccw(c-98.05,84.751) -99.846,82.955 -91.809,74.918 cw(c-93.605,73.122) -91.065,73.122 S219.2@-91.065,68.905
col4: S207.2 S208.2 S221.2 S222.2 S235.2 S236.2 S249.2 S250.2 S260.1 U301.14 | length 310.8
  Component Side w0.203: S260.1@-138.689,11.755 S260.1@-133.133,14.295 ; v1@-75.436,75.487 cw(c-74.995,75.046) -74.995,75.67 -41.607,75.67 cw(c-41.606,75.467) -41.523,75.652 ccw(c-41.275,76.2) -41.027,75.652 cw(c-40.944,75.467) -40.943,75.67 -39.011,75.67 ccw(c-39.011,75.692) v1(-38.989,75.692) ; U301.14@-28.992,59.089 -28.992,61.125 cw(c-28.244,61.125) -28.992,61.14 cw(c-28.789,61.138) -28.966,61.237 ccw(c-31.532,62.678) -28.773,61.654 ccw(c-31.532,62.678) -28.596,62.474 cw(c-28.393,62.46) -28.595,62.481 ccw(c-29.843,62.609) -28.589,62.609 -28.589,69.314 cw(c-25.646,69.314) -28.35,70.476 -28.348,70.479 cw(c-25.646,69.314) -27.727,71.395 -26.874,72.248 ccw(c-27.018,72.391) -26.817,72.366 ccw(c-29.337,72.68) -26.797,72.68 v1(-26.908,72.57)
  Bottom Layer w0.203: S260.1@-138.689,11.755 -142.708,15.774 cw(c-140.912,17.57) -143.452,17.57 S250.2@-143.452,30.805 ; S235.2@-133.927,49.855 S236.2@-152.977,49.855 ; S221.2@-129.165,68.905 S222.2@-148.215,68.905 ; S249.2@-124.402,30.805 S250.2@-143.452,30.805 ; v1(-75.438,75.438) -75.438,90.424 ccw(c-77.978,90.424) -77.978,92.964 -122.469,92.964 ccw(c-122.469,90.424) -124.265,92.22 S207.2@-125.99,90.495 -135.098,90.495 ccw(c-135.098,87.955) -136.894,89.751 S208.2@-138.69,87.955 -148.336,87.955 ccw(c-148.336,85.415) -150.876,85.415 -150.876,72.618 ccw(c-148.336,72.618) -150.132,70.822 S222.2@-148.215,68.905 ; v1@-39.116,75.692 cw(c-37.583,74.159) -39.115,75.693 cw(c-37.583,74.159) -37.583,76.327 -28.216,76.327 cw(c-28.216,74.803) -26.943,75.64 cw(c-28.216,74.803) -26.692,74.803 -26.692,73.089 cw(c-27.427,73.089) -26.734,72.845 cw(c-27.427,73.089) v1(-26.908,72.57) ; S236.2@-152.977,49.855 -152.977,40.259 ccw(c-150.437,40.259) -150.437,37.719 -145.992,37.719 cw(c-145.992,35.179) -143.452,35.179 S250.2@-143.452,30.805 ; S236.2@-152.977,49.855 -152.977,53.996 cw(c-150.437,53.996) -152.234,55.792 -148.959,59.067 ccw(c-150.755,60.863) -148.215,60.863 S222.2@-148.215,68.905
col5: S209.2 S210.2 S223.2 S224.2 S237.2 S238.2 S251.2 S252.2 S261.2 U301.41 | length 333.2
  Component Side w0.203: S251.2@-162.502,30.805 -162.502,34.671 cw(c-159.962,34.671) -159.962,37.211 -43.45,37.211 ccw(c-43.45,40.154) -41.37,38.072 -32.736,46.706 ccw(c-34.532,48.502) -31.992,48.502 U301.41@-31.992,50.639
  Bottom Layer w0.203: S261.2@-204.571,14.295 -196.596,14.295 ccw(c-196.596,16.835) -194.056,16.835 -194.056,28.265 cw(c-191.516,28.265) -191.516,30.805 S252.2@-181.552,30.805 S251.2@-162.502,30.805 -162.502,35.179 ccw(c-165.042,35.179) -165.042,37.719 -169.487,37.719 cw(c-169.487,40.259) -172.027,40.259 S237.2@-172.027,49.855 ; S238.2@-191.077,49.855 S237.2@-172.027,49.855 ; S224.2@-186.315,68.905 S223.2@-167.265,68.905 ; S210.2@-176.79,87.955 S209.2@-157.74,87.955 -157.74,71.445 cw(c-160.28,71.445) -160.28,68.905 S223.2@-167.265,68.905 ; S237.2@-172.027,49.855 -169.805,49.855 ccw(c-169.805,52.395) -167.265,52.395 S223.2@-167.265,68.905
col6: S211.2 S212.2 S225.2 S226.2 S239.2 S240.2 S253.2 S254.2 S262.1 S263.1 U301.40 | length 377
  Component Side w0.203: S253.2@-200.602,30.805 -200.602,35.074 cw(c-198.062,35.074) -198.062,37.614 -43.45,37.614 ccw(c-43.45,40.154) -41.654,38.358 -33.236,46.777 ccw(c-35.032,48.573) -32.492,48.573 U301.40@-32.492,50.639
  Bottom Layer w0.203: S263.1@-243.459,11.755 S262.1@-222.033,11.755 ; S262.1@-219.652,11.755 S254.2@-219.652,30.805 ; S212.2@-214.89,87.955 S211.2@-195.84,87.955 -195.84,71.445 cw(c-198.38,71.445) -198.38,68.905 S225.2@-205.365,68.905 -205.365,71.882 ccw(c-207.905,71.882) -207.905,74.422 -228.225,74.422 ccw(c-228.225,71.882) -230.765,71.882 S226.2@-230.765,71.445 -230.765,52.495 ccw(c-228.225,52.495) -230.021,50.699 S240.2@-229.177,49.855 -226.152,49.855 ccw(c-226.152,52.395) -224.356,50.599 -223.304,51.651 cw(c-221.508,49.855) -221.508,52.395 S239.2@-216.477,52.395 -216.477,46.957 cw(c-219.017,46.957) -217.221,45.161 -218.908,43.474 ccw(c-217.112,41.678) -218.991,43.387 ccw(c-217.112,41.678) -219.652,41.678 S254.2@-219.652,30.805 ; S253.2@-200.602,30.805 S254.2@-219.652,30.805
col7: S213.2 S214.2 S227.2 S228.1 S241.2 S242.2 S255.2 S256.2 S264.2 S267.2 U301.39 | length 458.3
  Component Side w0.203: S242.2@-273.627,71.445 cw(c-271.159,71.445) -271.159,73.914 -246.005,73.914 cw(c-246.005,71.374) -243.465,71.374 S227.2@-243.465,68.905 ; S267.2@-255.655,31.09 -259.396,34.831 cw(c-257.6,36.627) -260.14,36.627 S256.2@-260.14,49.855 S241.2@-254.571,52.395 ; S267.2@-252.195,33.345 -252.195,35.477 cw(c-249.655,35.477) -249.655,38.017 -43.617,38.017 ccw(c-43.617,40.557) -41.821,38.761 -33.736,46.847 ccw(c-35.532,48.643) -32.992,48.643 U301.39@-32.992,50.639
  Component Side w0.254: S255.2@-278.39,33.345 -278.313,33.345 ccw(c-278.313,33.401) S255.2@-278.257,33.401